# Altium PCB CP_PCB.PcbDoc
Units mil, origin at the board's own origin, x right, y up, seen from the top; angles counter-clockwise.
Board outline 2835 x 1335 mil, 2 copper layers (Top Layer, Bottom Layer); 35 components, 25 nets, 104 pads, 16 vias.
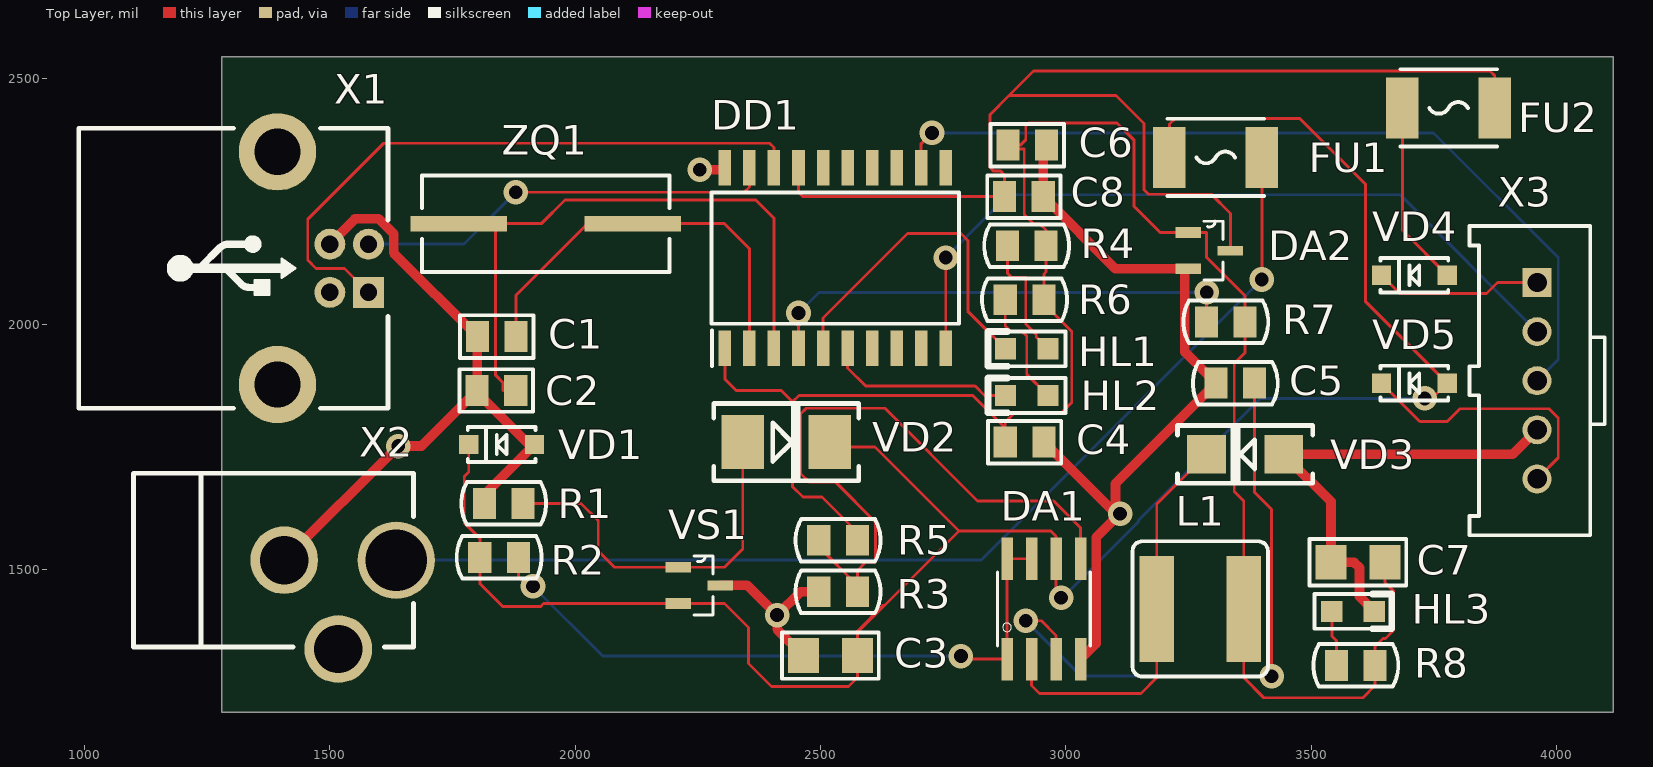
[diagram p0: Top Layer view]
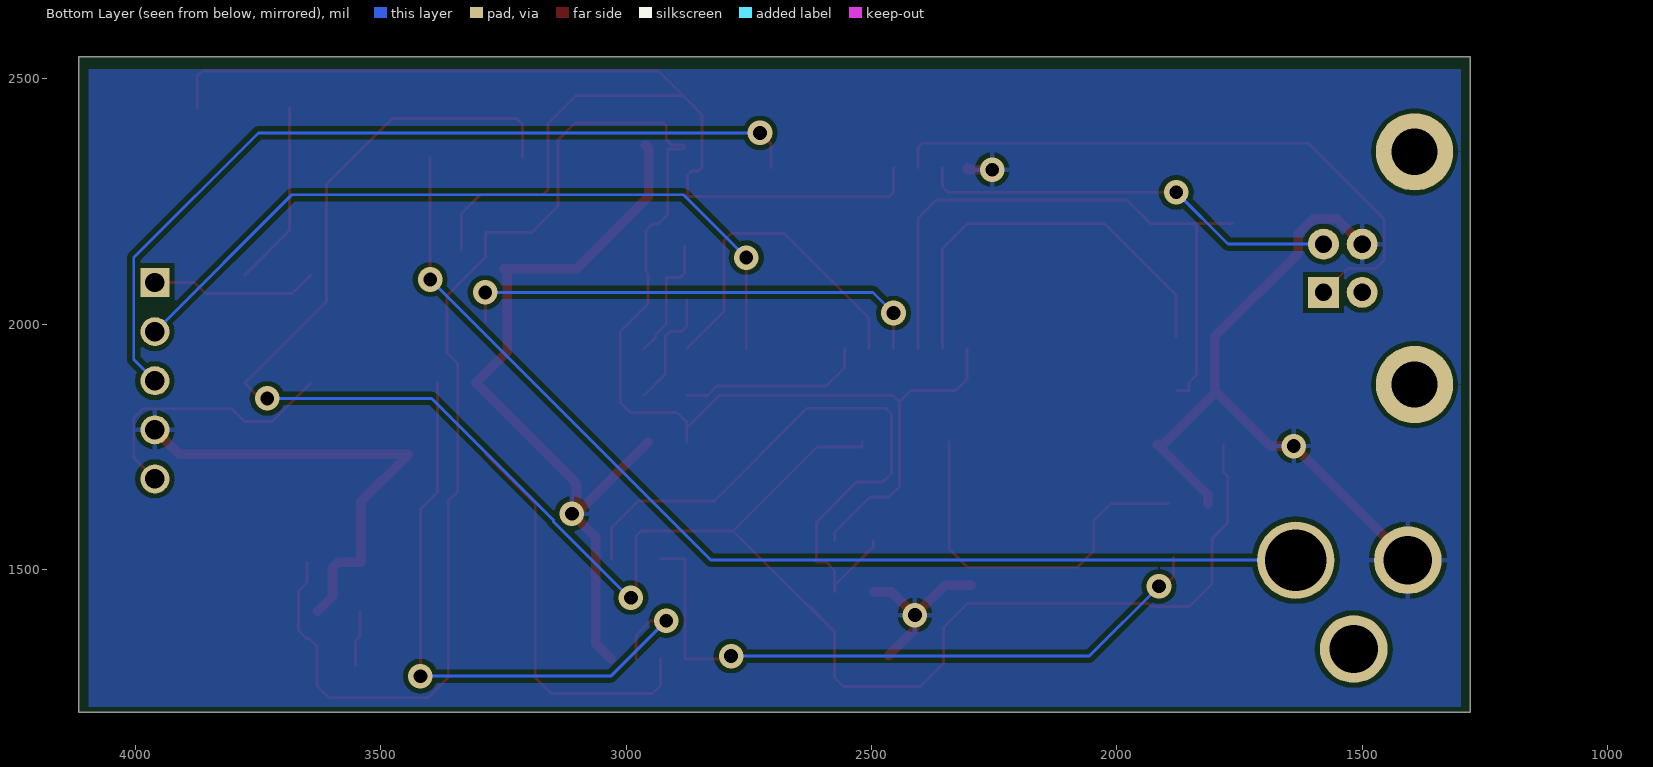
[diagram p1: Bottom Layer view, seen from below]
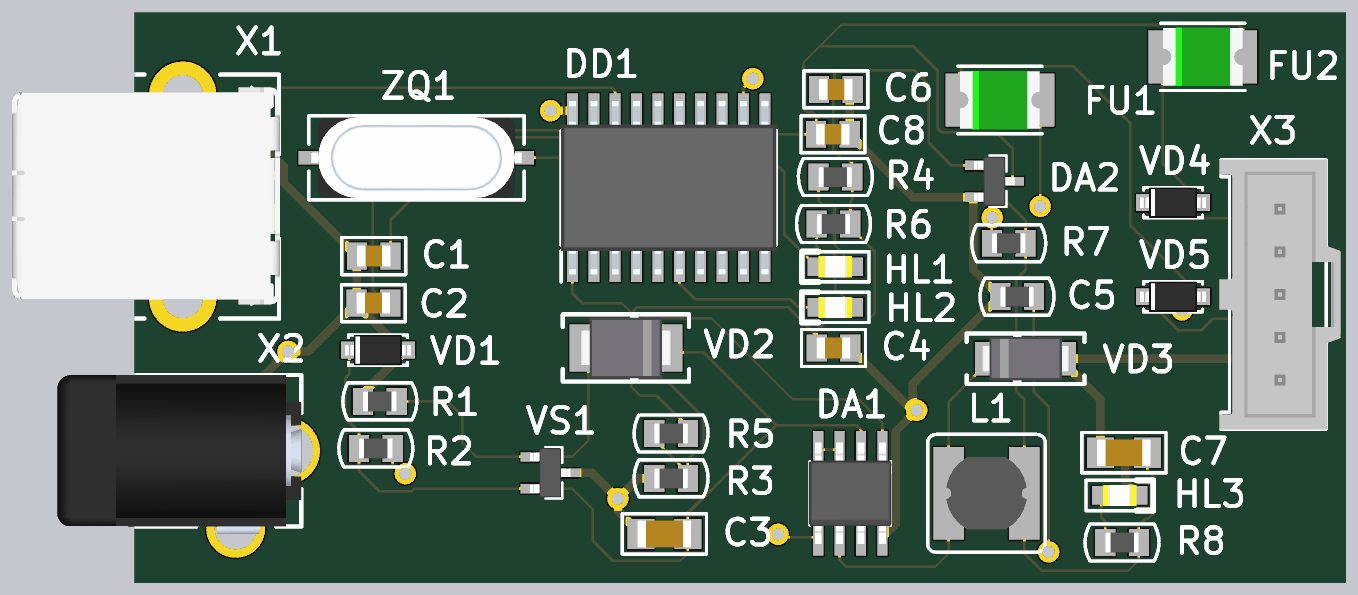
[diagram p2: 3D render of the assembled board from above, using the file's embedded part models]

## Layer stack, top to bottom
Top Solder: solder mask 0.4, Solder Resist, Dk 3.5
Top Layer: signal copper 1.4
Dielectric 1: dielectric 12.6, FR-4, Dk 4.8
Bottom Layer: signal copper 1.4
Bottom Solder: solder mask 0.4, Solder Resist, Dk 3.5

## Board outline
1280,1210 4115,1210 4115,2545 1280,2545

## Design rules (kind name [scope] priority, off if disabled: settings)
Clearance [All] p1: gap=10 ignorepadtopadclearanceinfootprint=FALSE except(0: Arc-Hole Track-Hole SMDPad-Hole THPad-Hole Via-Hole Fill-Hole Poly-Hole Region-Hole Text-Hole)
PolygonConnect [All] p1: connectstyle=Relief reliefconductorwidth=10 reliefentries=4 polygonreliefangle="90 Angle" airgapwidth=10
RoutingVias [All] p1: holewidth=28 width=50 viastyle="Through Hole" minholewidth=28 minwidth=50 maxholewidth=28 maxwidth=50
SolderMaskExpansion [All] p1: expansion=4
Width GND_0.5 [InNet('GND')] p1: maxlimit=19.68 minlimit=19.68 preferedwidth=19.68
Width PWR_0.3 [InNet('NetFP1_1')] p2: maxlimit=11.81 minlimit=11.81 preferedwidth=11.81
Width Width_1 [All] p3: maxlimit=5.91 minlimit=5.91 preferedwidth=5.91
30 further rules are at their usual default settings.

## Components (designator, comment, footprint, x,y, rotation, side; value= is the part's Value field where it differs from the comment)
C1 "Capacitor" C0805 1840,1975 r0 top value="14 х 50В"
C2 "Capacitor" C0805 1839.37,1865 r0 top value="14 х 50В"
C3 "Capacitor-E" C1206 2520,1325 r180 top
C4 "Capacitor" C0805 2915.63,1760 r0 top value="100 х 50В"
C5 "Capacitor" R0805 3345,1880 r0 top
C6 "Capacitor" C0805 2921.26,2365 r0 top value=470н
C7 "Capacitor-E" C1206 3595,1515 r180 top
C8 "Capacitor" C0805 2914.37,2260 r0 top value=33мк
DA1 "MC34063A" PCBComponent_1 2955,1420 r0 top
DA2 "LM3940" SOT95P237X112-3N 3292,2150 r0 top
DD1 "MCP2200" SOIC127P1030X265-20N 2530,2135 r90 top
FU1 "Fuse" F1812 3305,2340 r180 top value=1.3A
FU2 "Fuse" F1812 3779.53,2440.94 r180 top value=100мA
HL1 "LED_3V" LD0805 2920,1950 r180 top
HL2 "LED_3V" LD0805 2920,1855 r180 top
HL3 "LED_3V" LD0805 3585,1415 r0 top
L1 "Coil" МДГ-2 3273.58,1420 r0 top value=40мкГн
R1 "Resistor_10,0W" R0805 1854.37,1635 r0 top
R2 "Resistor_1,0W" R0805 1845,1525 r0 top value=0.15
R3 "Resistor_0,25W" R0805 2535.63,1455 r0 top value=1к
R4 "Resistor_0,05W" R0805 2920,2160 r0 top
R5 "Resistor_0,25W" R0805 2535.63,1560 r0 top value=3к
R6 "Resistor_0,05W" R0805 2915.63,2050 r0 top
R7 "Resistor_0,05W" R0805 3325.63,2005 r0 top value=1К
R8 "Resistor_0,05W" R0805 3590.63,1305 r0 top
VD1 "Diode" SOD-123 1850,1755 r180 top
VD2 "Suppressor" DO-214AA 2430,1760 r0 top
VD3 "Schottky" DO-214AC 3365,1735 r180 top
VD4 "Diode" SOD-123 3710,2100 r180 top
VD5 "Diode" SOD-123 3710,1880 r180 top
VS1 "tiristor" SOT95P237X112-3N 2253,1468 r0 top
X1 "USB" DS1099 1303.54,2114.21 r270 top
X2 "Vin" DJK-02-Series 1405,1480 r90 top
X3 "UART" 90136-1x05 3960,1885 r270 top
ZQ1 "Crystal" HC-49SM 1940,2205 r180 top

## Footprints (in the part's own frame and the unit in brackets; to place one, negate y for a bottom-side part, rotate by r counter-clockwise, add the part's x,y. Pads: shape width x height; smd on the part's side, far side on the other; paste and mask are expansions set on the pad)
90136-1x05 [mm]
  rect 1.5x1.5 hole 1: 1(-5.08,0)
  round 1.5 hole 1: 2(-2.54,0) 3(0,0) 4(2.54,0) 5(5.08,0)
  silkscreen extent -8,-3.5 8,3.5, body extent -8.02,-3.6 8.03,3.61, height 10.95
C0805 [mm] "2012M"
  rect 1.2x1.6 smd: 1(-1,0) 2(1,0)
  silkscreen extent -1.9,-1.1 1.9,1.1, body extent -1,-0.62 1,0.63, height 1.01
C1206 [mm] "3216M"
  rect 1.6x1.8 smd: 1(-1.4,0) 2(1.4,0)
  silkscreen extent -2.5,-1.2 2.5,1.2, body extent -1.6,-0.8 1.6,0.8, height 1.01
DJK-02-Series [mm]
  round 4 hole 3.2: 1(1,-5.85)
  round 3.5 hole 2.5: 2(1,-0.05) 3(-3.6,-2.85)
  silkscreen extent -3.5,-6.75 5.5,7.75, body extent -3.95,-6.75 5.5,7.75, height 11.5
DO-214AA [mm] "(SMB) Low profile package"
  rect 2.2x2.8 smd: 1(-2.25,0) 2(2.25,0)
  silkscreen extent -3.75,-2 3.75,2, body extent -2.7,-1.8 2.7,1.8, height 2.3
DO-214AC [mm] "(SMA) Low profile package"
  rect 2x2 smd: 1(-2,0) 2(2,0)
  silkscreen extent -3.5,-1.5 3.5,1.5, body extent -2.6,-1.3 2.6,1.3, height 2.4
DS1099 [mm]
  rect 1.6x1.6 hole 0.9: 1(1.25,6.99)
  round 1.6 hole 0.9: 2(-1.25,6.99) 3(-1.25,4.99) 4(1.25,4.99)
  round 4 hole 2.4: 5(-6.02,2.28) 5(6.02,2.28)
  silkscreen extent -7.25,-8 7.25,8, body extent -6.6,-7.87 6.52,8.07, height 11
F1812 [mm]
  rect 1.68x3.15 smd: 1(-2.39,0) 2(2.39,0)
  silkscreen extent -2.5,-2 2.5,2, body extent -2.36,-1.74 2.37,1.74, height 1.04
HC-49SM [mm] "HC49 Surface Mount Footprint"
  rect 5x0.8 smd: 1(-4.5,0) 3(4.5,0)
  silkscreen extent -6.4,-2.5 6.4,2.5, body extent -6.25,-2.4 6.25,2.4, height 4.02
LD0805 [mm]
  rect 1.1x1.1 smd: 1(-1.1,0) 2(1.1,0)
  silkscreen extent -2,-0.9 2,0.9, body extent -1,-0.62 1,0.63, height 0.73
PCBComponent_1 [mm]
  rect 0.6x2.2 smd: 1(-1.905,-2.6) 2(-0.635,-2.6) 3(0.635,-2.6) 4(1.905,-2.6) 5(1.905,2.6) 6(0.635,2.6) 7(-0.635,2.6) 8(-1.905,2.6)
  silkscreen extent -2.4,-1.9 2.4,1.9, body extent -2.45,-3.01 2.45,3.01, height 1.63
R0805 [mm] "2012M"
  rect 1.2x1.6 smd: 1(-1,0) 2(1,0)
  silkscreen extent -2.2,-1.1 2.2,1.1, body extent -1,-0.6 1,0.6, height 0.5
SOD-123 [mm] "КД-36"
  rect 1x1 smd: 1(-1.7,0) 2(1.7,0)
  silkscreen extent -1.75,-0.9 1.75,0.9, body extent -1.95,-0.9 1.95,0.9, height 1.19
SOIC127P1030X265-20N [mm]
  rect 1.85x0.65 smd: 1(-4.675,5.715) 2(-4.675,4.445) 3(-4.675,3.175) 4(-4.675,1.905) 5(-4.675,0.635) 6(-4.675,-0.635) 7(-4.675,-1.905) 8(-4.675,-3.175) 9(-4.675,-4.445) 10(-4.675,-5.715) 11(4.675,-5.715) 12(4.675,-4.445) 13(4.675,-3.175) 14(4.675,-1.905) 15(4.675,-0.635) 16(4.675,0.635) 17(4.675,1.905) 18(4.675,3.175) 19(4.675,4.445) 20(4.675,5.715)
  silkscreen extent -5.6,-6.4 3.4,6.4, body extent -5.15,-6.4 5.15,6.4, height 2.65
SOT95P237X112-3N [mil]
  rect 52x22 smd: 1(-43,37) 2(-43,-37)
  rect 52x20 smd: 3(43,0)
  silkscreen extent -11,-60 28,60, body extent -47,-57 47,57, height 46
МДГ-2 [mm]
  rect 1.8x5.5 smd: 1(-2.25,0) 2(2.25,0)
  Top Layer pour cut-out: -1.35,2.75 1.35,2.75 1.35,-2.75 -1.35,-2.75
  silkscreen extent -3.5,-3.5 3.5,3.5, body extent -2.4,-2.15 2.4,2.15, height 3.5

## Part data
C6 C8: Voltage=50В, Type=Конденсатор
HL1 HL2 HL3: library part Led-1, Published=03.12.2013, Publisher="Andrew Danich", Type="Индикатор единичный", Произв. номер=SMLE13EC8TT86
  HL1: Прямое напряжение=3В, Прямой ток=5мА, Цвет=Синий
  HL2: Прямое напряжение=3В, Прямой ток=5мА, Цвет=Зелёный
  HL3: Прямое напряжение=3.3В, Прямой ток=3мА, Цвет=Синий
L1: library part КИВ18-100, DC Resistance=1.2ohm, Manufacturer="ОАО \"МСТАТОР\"", Rated Current=185mA, Tolerance=±10%, Working Temperature Max=+85°С, Working Temperature Min=-60°С, Application Category=5, ID=1, Part Number=КИВ18-100, Published=20.05.2010, Publisher="Andrew Danich", Q=20, Specification="КВШУ.670114.001 ТУ", Type=Дроссель
VD3: "BYV10-40", Type=Диод, Максимальное обратное напряжение=40В, Прямой ток="1 А"
X1: library part USB_cut, Create=DeathSpeaker, GND=GND, In=D+, Out=D-
X3: library part UART_2, Create=Litvinov, GND=GND, In=TxD, Out=RxD, U=+3,3В
C1 C2 C4: Type=Конденсатор
C3: Published=20.08.2010, Publisher="Олег Литвинов", Type=Конденсатор, Ёмкость="100мк х 50В"
C5: Published=18.05.2010, Publisher="Andrew Danich", Type=Конденсатор, Ёмкость="400 х 50В"
C7: Published=20.08.2010, Publisher="Олег Литвинов", Type=Конденсатор, Ёмкость="10 х 50В"
DA2: Item ID=LM3940
DD1: Create=Litvinov, WTF=RTX
FU1 FU2: Type="Вставка плавкая"
R1: Type=Резистор, Сопротивление=30
R2 R3 R5 R7: Type=Резистор
R4 R6 R8: Type=Резистор, Сопротивление=470
VD1 VD4 VD5: Type=Диод
VD2: Type=Супрессор, Напряжение=12В
X2: Create=DeathSpeaker, GND=GND, In=D+, Out=D-, U=+12В
ZQ1: Published=08.03.2013, Publisher="Andrew Danich", Type=Резонатор, Частота=12МГц

## Via types
v1: diameter 50, hole 28, Top Layer to Bottom Layer, 16 vias

## Nets (pads, with @x,y where several pads share a name; then routed paths per layer and width w, separated by ;. In a path a pad name is that pad's centre, name@x,y a point inside that pad or via, vN(x,y) a via of type N, cw(c..) or ccw(c..) an arc to the next point about the centre after c; other vN are vias at no path point)
GND: C1.1 C2.1 C3.2 C4.2 C5.1 C6.2 C7.2 C8.2 DA1.4 DA2.2 DD1.20 HL3.2 R1.1 R3.1 VD1.1 VD3.1 VS1.3 X1.3 X2.2 X3.4 | length 4405.9
  Top Layer w19.68: X2.2 v1(1639.57,1751.97) 1686.97,1751.97 C2.1 ; X1.3 1551.34,2214.76 1600.01,2214.76 1630.08,2184.69 1630.08,2145.55 C1.1 1800.63,1865.63 C2.1 ; R1.1 1815,1653.07 VD1.1 1905.56,1755 1800,1860.56 C2.1 ; v1(2253.94,2315) 2305,2315 DD1.20 ; VS1.3 2350.9,1468 v1(2411.42,1407.48) ; C3.2 2411.42,1378.46 v1(2411.42,1407.48) ; R3.1 2458.94,1455 v1(2411.42,1407.48) ; C4.2 v1@3100.83,1614.17 ; C6.2 2953.74,2358.11 C8.2 3100.74,2113 DA2.2 3242.16,2106.16 3242.16,1943.47 C5.1 3100.83,1675.2 v1@3100.83,1614.17 ; DA1.4 3061.65,1349.29 3061.65,1565.59 v1(3110.24,1614.17) v1@3100.83,1614.17 ; HL3.2 3598,1445.31 3598,1504 3587,1515 C7.2 3539.88,1638.86 VD3.1 3910,1735 X3.4
NetC1_2: C1.2 DD1.2 ZQ1.1 | length 844.5
  Top Layer w5.91: C1.2 1879.37,2059.37 2025,2205 ZQ1.1 2304,2205 2355,2154 DD1.2
NetC2_2: C2.2 DD1.3 ZQ1.3 | length 1314.4
  Top Layer w5.91: ZQ1.3 ZQ1.3@1838,2205 ; C2.2 1853,1865 1853,1881 1838,1896 ZQ1.3@1838,2205 ; DD1.3 2405,2216 2368,2253 1979,2253 1931,2205 ZQ1.3@1838,2205
NetC3_1: C3.1 DA1.6 FU1.2 R2.1 VD1.2 VD2.2 VD5.1 VS1.2 | length 4320.8
  Top Layer w5.91: VD1.2 1783.07,1699.07 1774,1690 1774,1595.63 1805.63,1564 R2.1 1805.63,1472 1853.01,1424.62 1929,1424.62 1935.38,1431 VS1.2 2304,1431 2353,1382 2353,1309 2400,1262 2557.12,1262 2575.12,1280 C3.1 2575.12,1372.12 ; VD2.2 2518.58,1750 2611,1750 2782,1579 ; 2627.48,1427.36 2575.12,1375 2575.12,1372.12 ; v1(2990,1443) 2980,1453 DA1.6 2980,1568 2969,1579 2782,1579 ; FU1.2 3210.91,2408 3221.91,2419 3477,2419 3610,2286 3610,2046.93 VD5.1 3745.93,1849 v1(3731,1849) ; 2575.12,1372.12 2782,1579
  Bottom Layer w5.91: v1(2990,1443) 2992.74,1443 3148.19,1598.45 3148.19,1601.19 3396,1849 v1(3731,1849)
NetC4_1: C4.1 C6.1 C7.1 DA2.1 DD1.1 L1.2 R4.2 R5.2 R6.2 R7.2 R8.2 | length 3985.3
  Top Layer w5.91: DD1.1 2305,1888 2328,1865 2420,1865 2443,1842 ; R5.2 2575,1576 2503,1648 2464,1648 2443,1669 2443,1842 ; C4.1 C4.1@2876.26,1789 ; C7.1 3650.12,1473.99 3667,1457.1 3667,1376 3651,1360 3646,1360 3630,1344 R8.2 3630,1264 3605,1239 3403.16,1239 3362.16,1280 L1.2 3362.16,1639.84 3343,1659 3343,1920 3365,1942 R7.2 3365,2058 3286,2137 3286,2187 DA2.1 3192,2187 3139,2240 3139,2375 3104,2410 2924,2410 2918,2404 2918,2376 2907,2365 C6.1 2881.89,2357 2915,2357 2915,2224 2935,2204 2947.37,2204 2959.37,2192 R4.2 2959.37,2106.37 2955,2102 R6.2 2955,2042 3011.81,1985.19 3011.81,1840.55 2991.26,1820 2896,1820 2876.26,1800.26 C4.1@2876.26,1789 ; 2443,1842 2456,1855 2810.26,1855 C4.1@2876.26,1789
NetC5_2: C5.2 DA1.3 | length 1281.9
  Top Layer w5.91: v1(2918,1396) 2950,1396 2980,1366 DA1.3 ; C5.2 3384.37,1657.63 3419,1623 v1(3419,1283)
  Bottom Layer w5.91: v1(2918,1396) 3031,1283 v1(3419,1283)
NetC8_1: C8.1 DA2.3 DD1.17 FU2.1 | length 2501.8
  Top Layer w5.91: DD1.17 2455,2269 2464,2260 C8.1 2875,2304 2867,2312 2853,2312 2845,2320 2845,2427 2884,2466 ; DA2.3 3335,2226 3296,2265 3168,2265 3159,2274 3159,2409 3102,2466 2884,2466 ; FU2.1 3873.62,2506.38 3864,2516 2934,2516 2884,2466
NetDA1_1: DA1.1 DA1.7 DA1.8 R2.2 | length 1359.3
  Top Layer w5.91: R2.2 1884.37,1485.63 1904,1466 v1(1914,1466) ; v1(2786,1324) 2792.37,1317.63 DA1.1 DA1.8 DA1.7
  Bottom Layer w5.91: v1(1914,1466) 2056,1324 v1(2786,1324)
NetDA1_2: DA1.2 L1.1 VD3.2 | length 825.5
  Top Layer w5.91: DA1.2 2930,1264 2946,1248 3153,1248 3185,1280 L1.1 3185,1633.74 VD3.2
NetDA1_5: DA1.5 R3.2 R5.1 | length 1347.8
  Top Layer w5.91: R5.1 2496.26,1546.74 R3.2@2575,1468 ; R3.2 R3.2@2575,1468 ; DA1.5 3030,1585 2975,1640 2820,1640 2631,1829 2470.84,1829 2459,1817.16 2459,1696 2476,1679 2530,1679 2611.58,1597.42 2611.58,1515.55 2592,1515.55 2575,1498.55 R3.2@2575,1468
NetDD1_4: DD1.4 R7.1 | length 981.8
  Top Layer w5.91: DD1.4 v1(2455,2023) ; R7.1 3286.26,2064.26 v1(3287,2065)
  Bottom Layer w5.91: v1(2455,2023) 2497,2065 v1(3287,2065)
NetDD1_5: DD1.5 HL1.2 | length 686.8
  Top Layer w5.91: DD1.5 2505,2012.87 2677.17,2185.04 2785.96,2185.04 2800,2171 2800,2026.69 HL1.2
NetDD1_6: DD1.6 HL2.2 | length 384.8
  Top Layer w5.91: DD1.6 2555,1911 2592,1874 2815,1874 2834,1855 HL2.2
NetDD1_10: DD1.10 X3.2 | length 1558.6
  Top Layer w5.91: DD1.10 v1(2755,2136)
  Bottom Layer w5.91: v1(2755,2136) 2883,2264 3681,2264 X3.2
NetDD1_12: DD1.12 X3.3 | length 1730.1
  Top Layer w5.91: DD1.12 2705,2368 v1(2727,2390)
  Bottom Layer w5.91: v1(2727,2390) 3749,2390 4003,2136 4003,1928 X3.3
NetDD1_18: DD1.18 X1.1 | length 1293
  Top Layer w5.91: X1.1 1529.74,2114 1472,2114 1455,2131 1455,2214 1610,2369 2396,2369 2405,2360 DD1.18
NetDD1_19: DD1.19 X1.2 | length 863.6
  Top Layer w5.91: v1(1879,2269) 2344,2269 2355,2280 DD1.19
  Bottom Layer w5.91: X1.2 1773.42,2163.42 v1(1879,2269)
NetFU1_1: FU1.1 X2.1 | length 2249.4
  Top Layer w5.91: v1(3399.09,2091.28) FU1.1
  Bottom Layer w5.91: X2.1 2827.18,1519.37 v1(3399.09,2091.28)
NetFU2_2: FU2.2 VD4.1 | length 378.8
  Top Layer w5.91: FU2.2 3685.43,2191.5 VD4.1
NetHL1_1: HL1.1 R4.1 | length 260.9
  Top Layer w5.91: R4.1 2880.63,2104 2889.63,2095 2918,2095 2918,2000.51 2939.46,1979.05 2939.46,1973.84 HL1.1
NetHL2_1: HL2.1 R6.1 | length 244.5
  Top Layer w5.91: R6.1 2876.26,1996.74 2888,1985 2911,1985 2920,1976 2920,1898.31 HL2.1
NetHL3_1: HL3.1 R8.1 | length 114
  Top Layer w5.91: HL3.1 3541.69,1364.57 3551.26,1355 R8.1
NetR1_2: R1.2 VD2.1 VS1.1 | length 770.9
  Top Layer w5.91: R1.2 2012,1635 2047,1600 2047,1538 2080,1505 VS1.1 2304,1505 2341.42,1542.42 VD2.1
NetVD4_2: VD4.2 X3.1 | length 341.4
  Top Layer w5.91: VD4.2 3680.07,2063 3857,2063 3879,2085 X3.1
NetVD5_2: VD5.2 X3.5 | length 552.7
  Top Layer w5.91: VD5.2 3721.07,1802 3777,1802 3803,1828 3984,1828 4003,1809 4003,1728 X3.5
pads on no net: DD1.7 DD1.8 DD1.9 DD1.11 DD1.13 DD1.14 DD1.15 DD1.16 X1.4 X1.5 X2.3

## Polygon pours and split planes (outlines as drawn)
GND on Bottom Layer "Bottom Layer-GND" (solid, pour order 10): 1299.21,2519.68 4094.49,2519.68 4094.49,1220.47 1299.21,1220.47

## Silkscreen, mask and mechanical layers (free items; w line width, h text height)
Mechanical 19:
  the board outline again, w10

## Text inside footprints (layer, text, board x,y; h text height)
L1: Mechanical 13 "Check!" at 3131.85,1404.25 h60